# EAGLE board 23256_ROM-el_v1.1 (EAGLE 7.6.0)
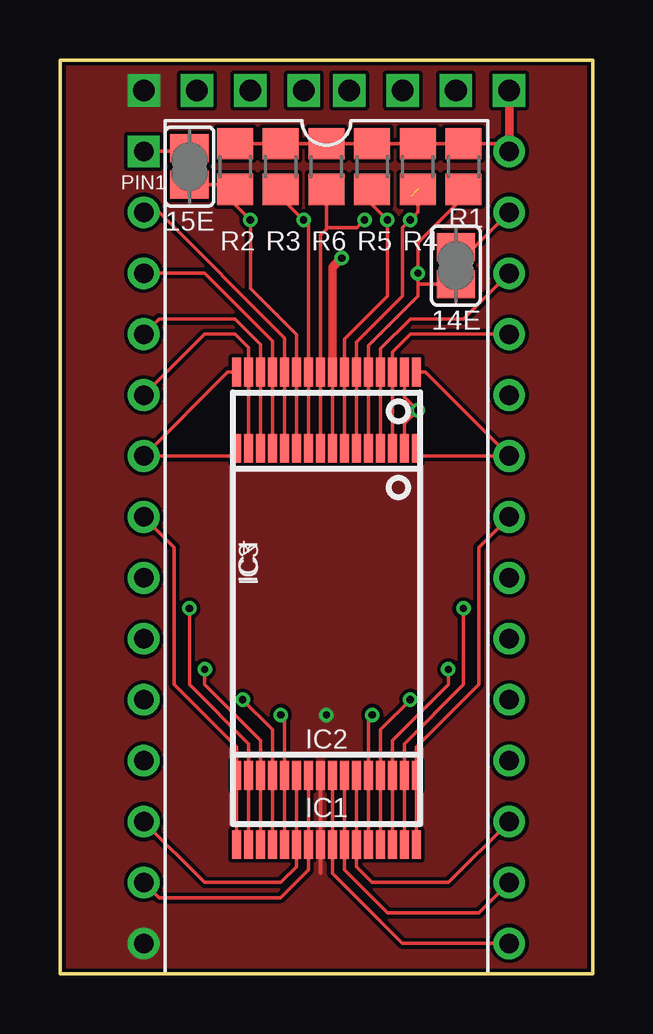
[diagram p0: board, top side]
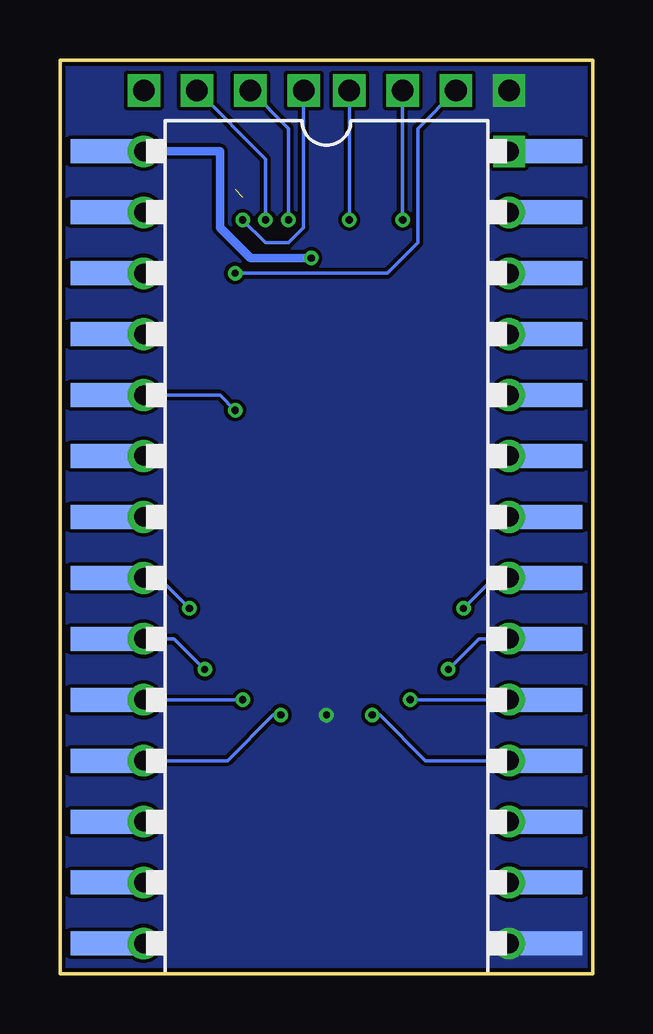
[diagram p1: board, bottom side, seen from below]

Size 22.23 x 38.1 mm. Coordinates in mm from the lower left corner, seen from the top.
Outline: 0,0 22.23,0 22.23,38.1 0,38.1 0,0
Copper layers (1*16): Top 0.035mm / dielectric 1.5mm / Bottom 0.035mm
Design rules "hackvana": minimum track width 6mil, minimum drill 0.3mm, track to track 6mil, track to pad 6mil, pad to pad 6mil, via to via 6mil, smd to smd 0mil, copper to edge 6mil, drill to drill 6mil, minimum pad ring 10mil, minimum via ring 6mil, stop-mask expansion 2mil, vias tented up to drill 100mil, thermal gap 10mil

## Footprints (pad centres in the part's own frame; a part is rotated, then mirrored left to right if it is on the bottom)
SJ = smd 1.168 x 1.6: 1 -0.762,0; 2 0.762,0
TSOP32 = smd 1.2 x 0.36: 1 -9.85,3.75; 2 -9.85,3.25; 3 -9.85,2.75; 4 -9.85,2.25; 5 -9.85,1.75; 6 -9.85,1.25; 7 -9.85,0.75; 8 -9.85,0.25; 9 -9.85,-0.25; 10 -9.85,-0.75; 11 -9.85,-1.25; 12 -9.85,-1.75; 13 -9.85,-2.25; 14 -9.85,-2.75; 15 -9.85,-3.25; 16 -9.85,-3.75; 17 9.85,-3.75; 18 9.85,-3.25; 19 9.85,-2.75; 20 9.85,-2.25; 21 9.85,-1.75; 22 9.85,-1.25; 23 9.85,-0.75; 24 9.85,-0.25; 25 9.85,0.25; 26 9.85,0.75; 27 9.85,1.25; 28 9.85,1.75; 29 9.85,2.25; 30 9.85,2.75; 31 9.85,3.25; 32 9.85,3.75
VSOP32 = smd 1.2 x 0.36: 1 -7.31,3.75; 2 -7.31,3.25; 3 -7.31,2.75; 4 -7.31,2.25; 5 -7.31,1.75; 6 -7.31,1.25; 7 -7.31,0.75; 8 -7.31,0.25; 9 -7.31,-0.25; 10 -7.31,-0.75; 11 -7.31,-1.25; 12 -7.31,-1.75; 13 -7.31,-2.25; 14 -7.31,-2.75; 15 -7.31,-3.25; 16 -7.31,-3.75; 17 6.322,-3.75; 18 6.322,-3.25; 19 6.322,-2.75; 20 6.322,-2.25; 21 6.322,-1.75; 22 6.322,-1.25; 23 6.322,-0.75; 24 6.322,-0.25; 25 6.322,0.25; 26 6.322,0.75; 27 6.322,1.25; 28 6.322,1.75; 29 6.322,2.25; 30 6.322,2.75; 31 6.322,3.25; 32 6.322,3.75
DIL28-ROUNDPAD = drill 0.813 square: 1 -16.51,-7.62 | drill 0.813: 2 -13.97,-7.62; 3 -11.43,-7.62; 4 -8.89,-7.62; 5 -6.35,-7.62; 6 -3.81,-7.62; 7 -1.27,-7.62; 8 1.27,-7.62; 9 3.81,-7.62; 10 6.35,-7.62; 11 8.89,-7.62; 12 11.43,-7.62; 13 13.97,-7.62; 14 16.51,-7.62; 15 16.51,7.62; 16 13.97,7.62; 17 11.43,7.62; 18 8.89,7.62; 19 6.35,7.62; 20 3.81,7.62; 21 1.27,7.62; 22 -1.27,7.62; 23 -3.81,7.62; 24 -6.35,7.62; 25 -8.89,7.62; 26 -11.43,7.62; 27 -13.97,7.62; 28 -16.51,7.62
DIL28-SMD-REVERSE = smd 1 x 3.5 bottom: 1 -16.51,-8.92; 2 -13.97,-8.92; 3 -11.43,-8.92; 4 -8.89,-8.92; 5 -6.35,-8.92; 6 -3.81,-8.92; 7 -1.27,-8.92; 8 1.27,-8.92; 9 3.81,-8.92; 10 6.35,-8.92; 11 8.89,-8.92; 12 11.43,-8.92; 13 13.97,-8.92; 14 16.51,-8.92; 15 16.51,8.92; 16 13.97,8.92; 17 11.43,8.92; 18 8.89,8.92; 19 6.35,8.92; 20 3.81,8.92; 21 1.27,8.92; 22 -1.27,8.92; 23 -3.81,8.92; 24 -6.35,8.92; 25 -8.89,8.92; 26 -11.43,8.92; 27 -13.97,8.92; 28 -16.51,8.92
R0805 = smd 1.3 x 1.5: 1 -0.95,0; 2 0.95,0

## Placement (x,y rotation side)
14E  [SJ]  16.51,29.53 90 top
15E  15E  [SJ]  5.4,33.66 90 top
IC1  FLASH_RAM4096KBT  [TSOP32]  11.11,15.24 270 top
IC2  FLASH_RAM4096KB'V'  [VSOP32]  11.11,14.61 270 top
IC3  23128-23512  [DIL28-ROUNDPAD]  11.11,17.78 270 top
IC4  23128-23512  [DIL28-SMD-REVERSE]  11.11,17.78 270 top
R1  [R0805]  16.83,33.66 90 top
R2  [R0805]  7.3,33.66 90 top
R3  [R0805]  9.21,33.66 90 top
R4  [R0805]  14.92,33.66 90 top
R5  [R0805]  13.02,33.66 90 top
R6  [R0805]  11.11,33.66 90 top

## Library data of the parts
14E 15E = jumper
IC1 IC2 = memory-jedec
IC3 IC4 = commodore
R1-R6 = resistor

## Nets
!WE: IC1.7 IC2.7 R5.1
A0: IC1.20 IC2.20 IC3.10 IC4.10
A1: IC1.19 IC2.19 IC3.9 IC4.9
A2: IC1.18 IC2.18 IC3.8 IC4.8
A3: IC1.17 IC2.17 IC3.7 IC4.7
A4: IC1.16 IC2.16 IC3.6 IC4.6
A5: IC1.15 IC2.15 IC3.5 IC4.5
A6: IC1.14 IC2.14 IC3.4 IC4.4
A7: IC1.13 IC2.13 IC3.3 IC4.3
A8: IC1.3 IC2.3 IC3.25 IC4.25
A9: IC1.2 IC2.2 IC3.24 IC4.24
A10: IC1.31 IC2.31 IC3.21 IC4.21
A11: IC1.1 IC2.1 IC3.23 IC4.23
A12: IC1.12 IC2.12 IC3.2 IC4.2
A13: IC1.4 IC2.4 IC3.26 IC4.26
A14: 14E.1 IC1.5 IC2.5 R1.1
A15: 15E.1 IC1.11 IC2.11 R2.1
A16: IC1.10 IC2.10 R3.1
A17: IC1.6 IC2.6 R4.1
A18: IC1.9 IC2.9 R6.1
D0: IC1.21 IC2.21 IC3.11 IC4.11
D1: IC1.22 IC2.22 IC3.12 IC4.12
D2: IC1.23 IC2.23 IC3.13 IC4.13
D3: IC1.25 IC2.25 IC3.15 IC4.15
D4: IC1.26 IC2.26 IC3.16 IC4.16
D5: IC1.27 IC2.27 IC3.17 IC4.17
D6: IC1.28 IC2.28 IC3.18 IC4.18
D7: IC1.29 IC2.29 IC3.19 IC4.19
GND: IC1.24 IC2.24 IC3.14 IC4.14
N$1: IC1.32 IC2.32 IC3.22 IC4.22
N$2: IC1.30 IC2.30 IC3.20 IC4.20
N$3: 14E.2 IC3.27 IC4.27
N$4: 15E.2 IC3.1 IC4.1
VCC: IC1.8 IC2.8 IC3.28 IC4.28 R1.2 R2.2 R3.2 R4.2 R5.2 R6.2

## Tracks (layer width: path | path; a pad name or v marks a point on that pad's centre or on a via)
!WE  (via drill 0.3, 0.9)
  Top 0.152: R5.1 13.02,32.07 v13.65,31.43 13.65,28.26 11.86,26.47 IC1.7 IC2.7
  Bottom 0.152: v16.51,36.83 13.65,33.97 v13.65,31.43
A0  (via drill 0.3)
  Top 0.152: v7.62,11.43 8.86,10.19 IC1.20 IC2.20
  Bottom 0.152: IC4.10 IC3.10 v7.62,11.43
A1  (via drill 0.3)
  Top 0.152: v6.03,12.7 6.03,12.06 8.36,9.73 IC2.19 IC1.19
  Bottom 0.152: IC4.9 IC3.9 4.76,13.97 v6.03,12.7
A2  (via drill 0.3)
  Top 0.152: v5.4,15.24 5.4,12.06 7.86,9.6 IC2.18 IC1.18
  Bottom 0.152: IC4.8 IC3.8 4.13,16.51 v5.4,15.24
A3
  Top 0.152: IC3.7 4.76,17.78 4.76,12.06 7.36,9.46 IC1.17 IC2.17
  Bottom 0.152: IC4.7 IC3.7
A4
  Top 0.152: IC1.16 6.99,25.09 IC3.6 | IC3.6 | IC3.6 7.3,21.59 7.3,21.91 IC2.16
  Bottom 0.152: IC4.6 IC3.6
A5
  Top 0.152: IC3.5 6.03,26.67 7.3,26.67 7.86,26.11 IC1.15 IC2.15
  Bottom 0.152: IC4.5 IC3.5
A6
  Top 0.152: IC3.4 4.13,27.3 7.3,27.3 8.36,26.25 IC1.14 IC2.14
  Bottom 0.152: IC4.4 IC3.4
A7
  Top 0.152: IC3.3 6.03,29.21 8.86,26.38 IC1.13 IC2.13
  Bottom 0.152: IC4.3 IC3.3
A8
  Top 0.152: IC3.25 14.61,26.67 13.86,25.93 IC1.3 IC2.3
  Bottom 0.152: IC4.25 IC3.25
A9  (via drill 0.3)
  Top 0.152: IC1.2 14.36,24.05 v14.92,23.5 14.36,22.93 IC2.2
  Bottom 0.152: v14.92,23.5 15.56,24.13 IC3.24 IC4.24
A10  (via drill 0.3)
  Top 0.152: v16.83,15.24 16.83,12.06 14.36,9.6 IC1.31 IC2.31
  Bottom 0.152: IC4.21 IC3.21 18.1,16.51 v16.83,15.24
A11
  Top 0.152: IC2.1 14.86,21.6 IC3.23 15.23,25.09 IC1.1
  Bottom 0.152: IC4.23 IC3.23
A12
  Top 0.152: IC3.2 4.13,31.75 9.36,26.52 IC1.12 IC2.12
  Bottom 0.152: IC4.2 IC3.2
A13
  Top 0.152: IC3.26 16.83,27.3 14.61,27.3 13.36,26.06 IC1.4 IC2.4
  Bottom 0.152: IC4.26 IC3.26
A14  (via drill 0.3, 0.9)
  Top 0.152: 14.92,28.77 v14.92,29.21 14.92,30.48 15.56,31.11 16.83,32.38 R1.1 | 14.92,28.77 14.92,28.26 12.86,26.2 IC1.5 IC2.5 | 14.92,28.77 14E.1
  Bottom 0.152: v5.72,36.83 7.3,35.24 7.3,30.48 8.57,29.21 v14.92,29.21
A15  (via drill 0.3, 0.9)
  Top 0.152: IC2.11 IC1.11 9.86,26.65 7.94,28.57 v7.94,31.43 7.3,32.07 R2.1 7.11,32.89 15E.1
  Bottom 0.152: v7.94,31.43 v7.94,36.83
A16  (via drill 0.3, 0.9)
  Top 0.152: R3.1 9.21,32.38 v10.16,31.43 10.36,31.23 IC1.10 IC2.10
  Bottom 0.152: v10.16,31.43 v10.16,36.83
A17  (via drill 0.3, 0.9)  (1 unrouted)
  Top 0.152: IC2.6 IC1.6 12.36,26.33 14.29,28.26 14.29,31.11 v14.61,31.43 14.92,31.75 R4.1 | 14.61,32.38 14.61,32.39
  Bottom 0.152: v12.06,36.83 12.06,31.11 12.7,30.48 13.65,30.48 v14.61,31.43
A18  (via drill 0.3, 0.9)
  Top 0.152: IC2.9 IC1.9 10.86,30.8 | v12.7,31.43 12.38,31.11 11.18,31.11 10.86,30.8 | R6.1 11.11,31.05 10.86,30.8
  Bottom 0.152: v14.29,36.83 12.7,35.24 v12.7,31.43
D0  (via drill 0.3)
  Top 0.152: v9.21,10.79 9.36,10.64 IC2.21 IC1.21
  Bottom 0.152: v9.21,10.79 8.89,10.79 6.99,8.89 IC3.11 IC4.11
D1
  Top 0.152: IC3.12 6.03,3.81 9.21,3.81 9.86,4.46 IC1.22 IC2.22
  Bottom 0.152: IC4.12 IC3.12
D2
  Top 0.152: IC3.13 4.13,3.17 9.21,3.17 10.36,4.33 IC1.23 IC2.23
  Bottom 0.152: IC4.13 IC3.13
D3
  Top 0.152: IC3.15 14.29,1.27 11.36,4.2 IC1.25 IC2.25
  Bottom 0.152: IC4.15 IC3.15
D4
  Top 0.152: IC3.16 17.46,2.54 13.65,2.54 11.86,4.33 IC1.26 IC2.26
  Bottom 0.152: IC4.16 IC3.16
D5
  Top 0.152: IC3.17 16.19,3.81 13.02,3.81 12.36,4.46 IC1.27 IC2.27
  Bottom 0.152: IC4.17 IC3.17
D6  (via drill 0.3)
  Top 0.152: v13.02,10.79 12.86,10.64 IC1.28 IC2.28
  Bottom 0.152: v13.02,10.79 13.34,10.79 15.24,8.89 IC3.18 IC4.18
D7  (via drill 0.3)
  Top 0.152: v14.61,11.43 13.36,10.19 IC1.29 IC2.29
  Bottom 0.152: IC4.19 IC3.19 v14.61,11.43
GND  (via drill 0.3, 0.9)
  Top 0.152: 10.86,4.2 IC1.24 IC2.24
  other vias: 11.11,10.79 3.49,36.83
  pour Top (no thermals): 0,38.1 22.23,38.1 22.23,0 0,0
  pour Bottom (no thermals): 0,38.1 22.23,38.1 22.23,0 0,0
N$1
  Top 0.152: IC3.22 17.46,17.78 17.46,12.06 14.86,9.46 IC1.32 IC2.32
  Bottom 0.152: IC4.22 IC3.22
N$2  (via drill 0.3)
  Top 0.152: v16.19,12.7 16.19,12.06 13.86,9.73 IC1.30 IC2.30
  Bottom 0.152: IC4.20 IC3.20 17.46,13.97 v16.19,12.7
N$3
  Top 0.152: IC3.27 17.27,30.29 14E.2
  Bottom 0.152: IC4.27 IC3.27
N$4
  Top 0.152: IC3.1 5.27,34.29 15E.2
  Bottom 0.152: IC4.1 IC3.1
VCC  (via drill 0.3, 0.9)
  Top 0.152: R1.2 16.83,34.29 | IC2.8 IC1.8 | R1.2 R4.2 R5.2 R6.2 R3.2 R2.2 | R1.2 18.73,34.6 18.73,34.92
  Top 0.356: IC3.28 18.73,34.92 v18.73,36.83 | IC1.8 11.36,29.46 v11.75,29.84
  Bottom 0.152: 17.61,34.29 IC3.28 IC4.28
  Bottom 0.356: v11.75,29.84 14.29,29.84 15.56,31.11 15.56,34.29 IC3.28

## Text on the board
tNames: PIN1
tValues: - | 14 | 15 | 16 | 17 | 18 | !WE | + | ROM-el | www.go4retro.com | (c)2009-11 RETRO Innovations